# Altium PCB PCB1.PcbDoc (part 3 of 4)
Units mil, origin at the board's own origin, x right, y up, seen from the top; angles counter-clockwise.
Board outline 3904 x 3805 mil, 4 copper layers (Top Layer, Layer 2, Layer 3, Bottom Layer), stack 23.756 mil thick; 231 components, 342 nets, 1187 pads, 543 vias.
Unrouted connection lines stored in the file: 4.
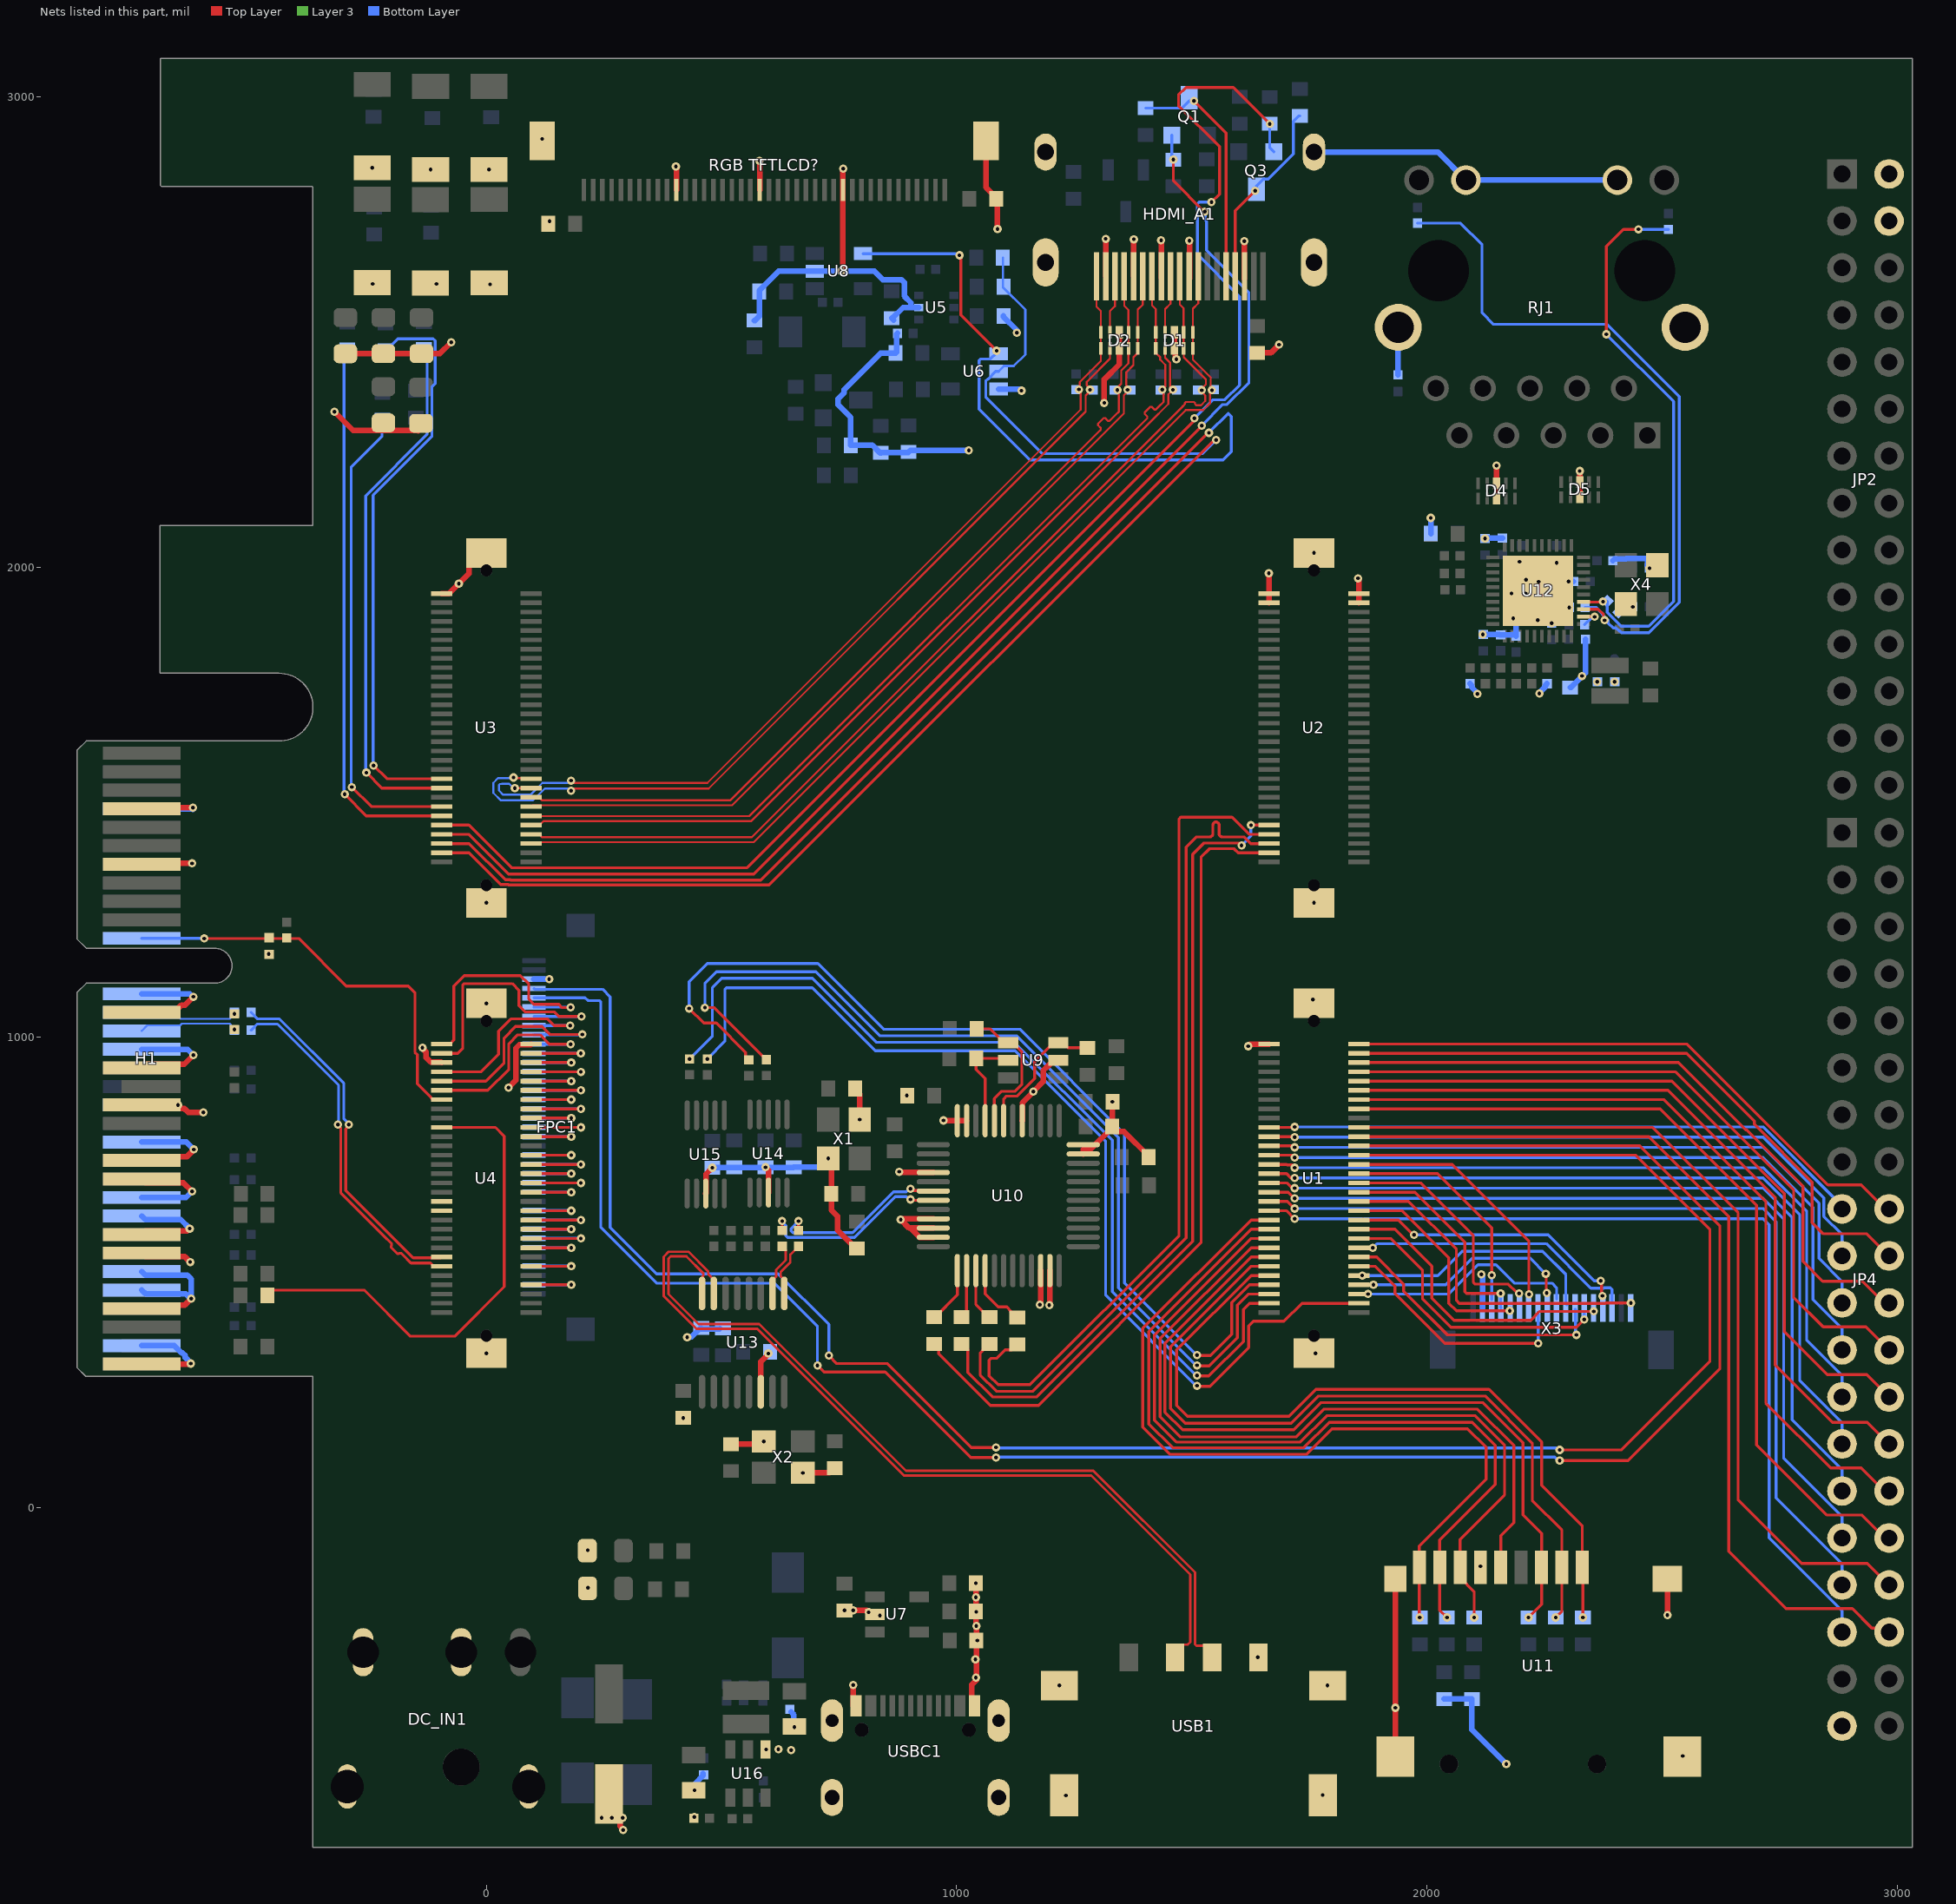
[diagram p5: the nets of this part, all layers, seen from the top]

## Via types
v1: diameter 17.7, hole 7.9, Top Layer to Bottom Layer, tented both sides, 543 vias

## Nets (pads, with @x,y where several pads share a name; then routed paths per layer and width w, separated by ;. In a path a pad name is that pad's centre, name@x,y a point inside that pad or via, vN(x,y) a via of type N, cw(c..) or ccw(c..) an arc to the next point about the centre after c; other vN are vias at no path point) (continued)
B16_N_L5: FPC1.30 U4.20 | length 164.4
  Top Layer w6.16: U4.20@95.47,591.72 v1(180.39,591.72)
  Bottom Layer w6.16: FPC1.30@101,591.95 101.11,591.83 180.28,591.83 v1(180.39,591.72)
B16_N_L6: FPC1.31 U4.18 | length 205.5
  Top Layer w6.16: U4.18@95.47,572.04 v1(200.93,572.04)
  Bottom Layer w6.16: FPC1.31@101,572.26 101.11,572.15 200.82,572.15 v1(200.93,572.04)
B16_N_L7: FPC1.19 U4.42 | length 205.5
  Top Layer w6.16: U4.42@95.47,808.26 v1(200.93,808.26)
  Bottom Layer w6.16: FPC1.19@101,808.48 101.11,808.37 200.82,808.37 v1(200.93,808.26)
B16_N_L8: FPC1.24 U4.32 | length 164.4
  Top Layer w6.16: U4.32@95.47,709.83 v1(180.39,709.83)
  Bottom Layer w6.16: FPC1.24@101,710.05 101.11,709.94 180.28,709.94 v1(180.39,709.83)
B16_N_L9: FPC1.8 U4.53 | length 431.6
  Top Layer w6.16: U4.53@-95.46,926.37 -11.63,926.37 26,964 26,1013 52,1039 130,1039 144,1025 v1(178,1025)
  Bottom Layer w6.16: FPC1.8@101,1025.02 v1(178,1025)
B16_N_L10: FPC1.10 U4.49 | length 441.8
  Top Layer w6.16: U4.49@-95.46,887 3,887 47.61,931.61 47.61,986.14 66.48,1005 114,1005 134,985 v1(179,985)
  Bottom Layer w6.16: FPC1.10@101,985.65 101.32,985.32 178.68,985.32 v1(179,985)
B16_N_L11: FPC1.15 U4.50 | length 205.5
  Top Layer w6.16: U4.50@95.47,887 v1(200.93,887)
  Bottom Layer w6.16: FPC1.15@101,887.22 101.11,887.11 200.82,887.11 v1(200.93,887)
B16_N_L12: FPC1.17 U4.46 | length 205.5
  Top Layer w6.16: U4.46@95.47,847.63 v1(200.93,847.63)
  Bottom Layer w6.16: FPC1.17@101,847.85 101.11,847.74 200.82,847.74 v1(200.93,847.63)
B16_N_L13: FPC1.13 U4.54 | length 205.5
  Top Layer w6.16: U4.54@95.47,926.37 v1(200.93,926.37)
  Bottom Layer w6.16: FPC1.13@101,926.59 101.11,926.48 200.82,926.48 v1(200.93,926.37)
B16_N_L14: FPC1.26 U4.28 | length 164.4
  Top Layer w6.16: U4.28@95.47,670.46 v1(180.39,670.46)
  Bottom Layer w6.16: FPC1.26@101,670.68 101.11,670.57 180.28,670.57 v1(180.39,670.46)
B16_N_L15: FPC1.7 U4.57 | length 587.3
  Top Layer w6.16: U4.57@-95.46,965.74 -60.61,965.74 -50.5,975.85 -50.5,1110.39 -46.89,1114 55,1114 69,1100 69,1067 82,1054 144,1054 154,1044 v1(202,1044)
  Bottom Layer w6.16: FPC1.7@101,1044.7 101.35,1044.35 201.65,1044.35 v1(202,1044)
B16_N_L16: Q1.2 R21.2 U3.7 | length 2780.6
  Top Layer w6.16: U3.7@-95.47,1431.61 -37.61,1431.61 47,1347 568.84,1347 1521.27,2299.43 v1(1521.27,2300.86) ; v1(1461,2866.54) 1461,2821 1526,2756 v1(1527.88,2756)
  Bottom Layer w6.16: Q1.2@1458,2918 1458,2869.54 v1(1461,2866.54) ; v1(1521.27,2300.86) 1565.96,2345.55 1574.97,2345.55 1621.69,2392.27 1621.69,2583.15 1531.63,2673.21 1531.63,2734.83 1528.55,2737.91 1528.55,2755.33 v1(1527.88,2756)
B16_N_L17: U3.5 U6.1 U8.4 | length 3379.6
  Top Layer w6.16: U3.5@-95.47,1411.93 -36.93,1411.93 40.31,1334.69 50.45,1334.69 51.14,1334 583.68,1334 1535.19,2285.51 v1(1536.62,2285.51) ; v1(1006,2663) 1009,2660 1009,2536 v1(1085,2460)
  Bottom Layer w6.16: U8.4@800.77,2666.4 997.6,2666.4 998.79,2665.21 1000.67,2665.21 1002,2663.88 v1@1002,2662 ; v1(1085,2460) 1085,2455.22 1072.26,2442.48 1051.61,2442.48 1048,2438.87 1048,2336 1156,2228 1567,2228 1584,2245 1584,2320 1577.55,2326.45 v1(1536.62,2285.51)
B16_N_L18: D2.4 D2.7 HDMI_A1.3 R7.1 U3.20 | length 2041.4
  Top Layer w4.29: v1(57.7,1552.39) 59.03,1551.06 94.14,1551.06 U3.20@95.47,1549.72 ; v1(180,1524.15) 184.85,1529 472.55,1529 1274.29,2330.74 1274.29,2364.79 1281,2371.5 v1@1281,2379 ; v1@1282,2379 v1@1282.78,2379.78 ; v1(1283.7,2377) 1281.35,2379.35 1281.35,2381.87 1277,2386.22 1277,2394 1326.31,2443.31 1326.31,2464.75 D2.4@1326.31,2499 1326.31,2544.31 1336.83,2554.83 HDMI_A1.3@1336.83,2618
  Bottom Layer w4.29: v1(57.7,1552.39) 56.31,1551 24.65,1551 14.72,1541.06 14.72,1519.7 30.7,1503.72 98.71,1503.72 123.99,1529 171.52,1529 176.37,1524.15 v1(180,1524.15)
B16_N_L19: FPC1.11 U4.58 | length 205.5
  Top Layer w6.16: U4.58@95.47,965.74 v1(200.74,965.74)
  Bottom Layer w6.16: FPC1.11@101,965.96 101.11,965.85 200.63,965.85 v1(200.74,965.74) v1@201,966
B16_N_L20: D1.1 D1.10 HDMI_A1.12 R1.1 U3.6 | length 2124.2
  Top Layer w4.29: U3.6@95.47,1411.93 98.25,1414.7 119.7,1414.7 119.92,1414.92 568.47,1414.92 1487.5,2333.95 1524.2,2333.95 1539.23,2348.98 1539.23,2373.23 1542,2376 v1(1543,2376) ; HDMI_A1.12@1514,2618 1514,2561 1502.37,2549.37 D1.1@1502.37,2499 1502.37,2464.75 1502.37,2441.18 1540.43,2403.12 v1@1540.43,2375.43
B16_N_L21: R54.2 U3.11 | length 1174.2
  Top Layer w6.16: v1(-301.34,1516.66) -255.67,1470.98 U3.11@-95.47,1470.98
  Bottom Layer w6.16: v1(-301.34,1516.66) -302.96,1518.27 -302.96,2437.65 -296,2444.61 R54.2@-296,2462.46
B16_N_L22: D2.1 D2.10 HDMI_A1.6 R5.1 U3.14 | length 1914.8
  Top Layer w4.29: U3.14@95.47,1490.67 98.25,1493.45 522.44,1493.45 1355.65,2326.65 1355.65,2365.42 1363.8,2373.56 v1(1363.8,2377.03) ; v1@1361.23,2378.23 1361.23,2386.01 1361,2386.24 1361,2414.27 1375.97,2429.24 1375.97,2446.29 1383.18,2453.51 1383.58,2453.51 1385.37,2455.3 D2.1@1385.37,2499 1385.37,2547.37 1395.89,2557.89 HDMI_A1.6@1395.89,2618
B16_N_L23: D1.4 D1.7 HDMI_A1.9 R3.1 U3.10 | length 2005.4
  Top Layer w4.29: U3.10@95.47,1451.3 113.19,1451.3 121.81,1459.92 563.47,1459.92 1411.28,2307.72 1450.33,2346.77 1450.33,2367.33 v1(1460,2377) ; v1@1454.31,2382 1454.31,2434.33 1443.31,2445.33 1443.31,2464.75 D1.4@1443.31,2499 1443.31,2548.31 1454.94,2559.94 HDMI_A1.9@1454.94,2618
B16_N_L24: R50.2 U3.19 | length 1231.9
  Top Layer w6.16: v1(-239.97,1578.03) -211.66,1549.72 U3.19@-95.47,1549.72
  Bottom Layer w6.16: v1(-239.97,1578.03) -241,1579.07 -241,2152.58 -116.03,2277.55 -116.03,2383.17 -109,2390.19 -109,2452 ; R50.2@-218,2469 -204.61,2469 -188.19,2485.43 -113.34,2485.43 -109.19,2481.28 -109.19,2452
B16_P_L1: FPC1.36 U4.8 | length 165.3
  Top Layer w6.16: U4.8@95.47,473.61 v1(180.39,473.61)
  Bottom Layer w6.16: FPC1.36@101,473.84 101.11,473.72 180.28,473.72 v1(180.39,473.61) v1@181,473
B16_P_L2: FPC1.28 U4.24 | length 164.4
  Top Layer w6.16: U4.24@95.47,631.09 v1(180.39,631.09)
  Bottom Layer w6.16: FPC1.28@101,631.32 101.11,631.2 180.28,631.2 v1(180.39,631.09)
B16_P_L3: FPC1.22 U4.36 | length 164.4
  Top Layer w6.16: U4.36@95.47,749.2 v1(180.39,749.2)
  Bottom Layer w6.16: FPC1.22@101,749.43 101.22,749.2 v1(180.39,749.2)
B16_P_L4: FPC1.34 U4.12 | length 164.4
  Top Layer w6.16: U4.12@95.47,512.98 v1(180.39,512.98)
  Bottom Layer w6.16: FPC1.34@101,513.2 101.11,513.09 180.28,513.09 v1(180.39,512.98)
B16_P_L5: FPC1.29 U4.22 | length 231.6
  Top Layer w6.16: U4.22@95.47,611.41 v1(200.93,611.41)
  Bottom Layer w6.16: FPC1.29@101,611.63 88.15,611.63 87.92,611.41 v1(200.93,611.41)
B16_P_L6: FPC1.32 U4.16 | length 164.4
  Top Layer w6.16: U4.16@95.47,552.35 v1(180.39,552.35)
  Bottom Layer w6.16: FPC1.32@101,552.57 101.11,552.46 180.28,552.46 v1(180.39,552.35)
B16_P_L7: FPC1.20 U4.40 | length 164.4
  Top Layer w6.16: U4.40@95.47,788.57 v1(180.39,788.57)
  Bottom Layer w6.16: FPC1.20@101,788.8 101.11,788.68 180.28,788.68 v1(180.39,788.57)
B16_P_L8: FPC1.23 U4.34 | length 205.5
  Top Layer w6.16: U4.34@95.47,729.52 v1(200.93,729.52)
  Bottom Layer w6.16: FPC1.23@101,729.74 101.11,729.63 200.82,729.63 v1(200.93,729.52)
B16_P_L9: FPC1.9 U4.51 | length 489
  Top Layer w6.16: U4.51@-95.46,906.68 -1.32,906.68 37.45,945.45 37.45,998.45 62,1023 118,1023 135,1006 v1(204,1006)
  Bottom Layer w6.16: FPC1.9@101,1005.33 101.33,1005.67 203.67,1005.67 v1(204,1006)
B16_P_L10: C49.2 H1.A11 R84.1 U4.47 | length 891
  Top Layer w6.16: v1(-600,1210) -423.73,1210 -423,1210.73 -422.27,1210 -399,1210 -298,1109 -166,1109 -152,1095 -152,968 -147,963 -147,900.96 -120.83,874.79 -120.66,874.79 -113.18,867.31 U4.47@-95.46,867.31
  Bottom Layer w6.16: H1.A11@-733,1210.31 -600.31,1210.31 v1(-600,1210)
B16_P_L11: FPC1.16 U4.48 | length 164.4
  Top Layer w6.16: U4.48@95.47,867.31 v1(180.39,867.31)
  Bottom Layer w6.16: FPC1.16@101,867.53 101.11,867.42 180.28,867.42 v1(180.39,867.31)
B16_P_L12: FPC1.18 U4.44 | length 164.4
  Top Layer w6.16: U4.44@95.47,827.94 v1(180.39,827.94)
  Bottom Layer w6.16: FPC1.18@101,828.16 101.11,828.05 180.28,828.05 v1(180.39,827.94)
B16_P_L13: FPC1.14 U4.52 | length 164.4
  Top Layer w6.16: U4.52@95.47,906.68 v1(180.39,906.68)
  Bottom Layer w6.16: FPC1.14@101,906.91 101.11,906.79 180.28,906.79 v1(180.39,906.68)
B16_P_L14: FPC1.25 U4.30 | length 205.5
  Top Layer w6.16: U4.30@95.47,690.15 v1(200.93,690.15)
  Bottom Layer w6.16: FPC1.25@101,690.37 101.11,690.26 200.82,690.26 v1(200.93,690.15)
B16_P_L15: FPC1.6 U4.59 | length 527.7
  Top Layer w6.16: U4.59@-95.46,985.42 -77.75,985.42 -69.17,994 -69.17,1109.17 -47.34,1131 72,1131 90,1113 90,1081 101,1070 154,1070 161,1063 178.54,1063 v1(179,1063.46)
  Bottom Layer w6.16: FPC1.6@101,1064.39 101.46,1063.92 178.54,1063.92 v1(179,1063.46)
B16_P_L16: Q3.2 R30.2 U3.9 | length 3184.9
  Top Layer w6.16: U3.9@-95.47,1451.3 -37.42,1451.3 53.39,1360.48 554.48,1360.48 1507,2313 1507,2315.13 v1(1505.93,2316.2) ; v1(1542,2776) 1559,2793 1559,2894 1472,2981 1472,3004 1488,3020 1588.46,3020 v1(1666,2942.46)
  Bottom Layer w6.16: v1(1505.93,2316.2) 1545.43,2355.71 1570.76,2355.71 1602,2386.95 1602,2575 1511.94,2665.06 1511.94,2772.39 1515.55,2776 v1(1542,2776) ; v1(1666,2942.46) 1666,2891.81 Q3.2@1674.79,2883.02
B16_P_L17: R10.1 R12.2 U3.3 U6.2 | length 2987.4
  Top Layer w6.16: U3.3@-95.47,1392.24 -37.24,1392.24 30.47,1324.53 46.24,1324.53 46.93,1323.84 601.36,1323.84 1548.76,2271.24 1550.89,2271.24 v1(1551.96,2270.17)
  Bottom Layer w5: U6.2@1089.18,2416 1100.68,2427.5 1121.5,2427.5 1146,2452 1146,2547.57 1098.54,2595.03 R10.1@1098.54,2658
  Bottom Layer w6.16: U6.2@1089.18,2416 1083.18,2416 1067.07,2399.89 1066.46,2399.89 1062.1,2395.53 1062.1,2361.67 1182.77,2241 1522.79,2241 v1(1551.96,2270.17)
B16_P_L18: D2.5 D2.6 HDMI_A1.1 R8.1 U3.18 | length 1975.9
  Top Layer w4.29: v1(60.38,1529.57) 60.62,1529.8 95.23,1529.8 U3.18@95.47,1530.04 ; v1(180,1545.85) 184.85,1541 470,1541 1264,2335 1264,2375 v1@1262,2377 ; v1(1260.29,2377.66) 1262,2379.37 1262,2393.55 1306.63,2438.18 D2.5@1306.63,2499 1306.63,2544.37 1297.46,2553.54 HDMI_A1.1@1297.46,2618
  Bottom Layer w4.29: 33,1538.61 29.23,1538.61 26.72,1536.09 26.72,1524.67 35.67,1515.72 93.74,1515.72 119.02,1541 171.52,1541 176.37,1545.85 v1(180,1545.85) ; 33,1539 48.2,1539 57.64,1529.57 v1(60.38,1529.57)
B16_P_L19: FPC1.12 U4.56 | length 164.4
  Top Layer w6.16: U4.56@95.47,946.05 v1(180.39,946.05)
  Bottom Layer w6.16: FPC1.12@101,946.28 101.11,946.16 180.28,946.16 v1(180.39,946.05)
B16_P_L20: D1.2 D1.9 HDMI_A1.10 R2.1 U3.8 | length 2120
  Top Layer w4.29: U3.8@95.47,1431.61 113.19,1431.61 115.96,1428.84 115.96,1427.72 118.48,1425.21 564.21,1425.21 1481,2342 1485.66,2346.66 1485.66,2348.95 1487.79,2351.08 1504.82,2351.08 1506.95,2348.95 1506.95,2346.75 1509.46,2344.24 1512,2344.24 1519.94,2344.24 1528.94,2353.24 1528.94,2364.73 1521.3,2372.37 v1(1521.3,2376) ; HDMI_A1.10@1474.63,2618 1474.63,2558.37 1482.68,2550.32 D1.2@1482.68,2499 D1.9@1482.68,2464.75 1483.07,2464.36 1483.07,2445.93 1530.14,2398.86 1530.14,2388.36 1523.92,2382.14 1523.92,2379.08 v1@1524,2379
B16_P_L21: R53.2 U3.13 | length 1017.4
  Top Layer w6.16: v1(-286,1532) -244.67,1490.67 U3.13@-95.47,1490.67
  Bottom Layer w6.16: v1(-286,1532) -287.62,1533.62 -287.62,2212.99 -222,2278.61 -222,2312.46 R53.2@-221,2313.46
B16_P_L22: D2.2 D2.9 HDMI_A1.4 R6.1 U3.16 | length 1909.7
  Top Layer w4.29: U3.16@95.47,1510.35 113.19,1510.35 115.96,1507.58 115.96,1506.25 118.48,1503.74 518.18,1503.74 1305.22,2290.78 1306.74,2292.29 1306.74,2295.85 1300.85,2301.74 1300.85,2304.75 1312.89,2316.79 1315.9,2316.79 1321.8,2310.9 1325.35,2310.9 1338.72,2324.28 1345.36,2330.92 1345.36,2367.22 1344.56,2368.01 1344.56,2373.87 v1(1342,2376.43) ; v1@1344.67,2384.3 1350,2389.63 1350,2417.82 1365.68,2433.5 D2.2@1365.68,2499 1365.68,2546.32 1356.52,2555.48 HDMI_A1.4@1356.52,2618
B16_P_L23: D1.5 D1.6 HDMI_A1.7 R4.1 U3.12 | length 2016.9
  Top Layer w4.29: U3.12@95.47,1470.98 96.25,1470.21 559.21,1470.21 1404,2315 1405.52,2316.52 1405.52,2320.07 1399.89,2325.7 1399.89,2328.71 1411.93,2340.76 1414.94,2340.76 1420.57,2335.13 1424.13,2335.13 1430.5,2341.5 1440.04,2351.04 1440.04,2374.82 v1(1437.47,2377.38) 1444.02,2383.93 1444.02,2430.07 1433.02,2441.07 1433.02,2445.91 1423.63,2455.3 D1.5@1423.63,2499 1423.63,2548.37 1415.57,2556.43 HDMI_A1.7@1415.57,2618
  Bottom Layer w4.29: R4.1@1433,2376.54 1433.85,2377.38 v1(1437.47,2377.38)
B16_P_L24: R51.2 U3.17 | length 1126.3
  Top Layer w6.16: v1(-255.31,1562.69) -222.66,1530.04 U3.17@-95.47,1530.04
  Bottom Layer w6.16: v1(-255.31,1562.69) -256.93,1564.31 -256.93,2151.02 -126.19,2281.76 -126.19,2451.9 -131.29,2457 R51.2@-133,2457
B34_IO0: JP4.17 U1.41 | length 1294.8
  Top Layer w6.16: U1.41@1664.54,808.26 1717.99,808.26 v1(1719,809.26)
  Bottom Layer w6.16: v1(1719,809.26) 2715,809.26 2883.07,641.19 JP4.17@2883.07,635
B34_IO25: JP4.20 U1.58 | length 1360.6
  Top Layer w6.16: U1.58@1855.47,965.74 2552.39,965.74 2696.41,821.72 2696.41,814.82 2819.54,691.69 2819.54,605.46 2843,582 2936.07,582 JP4.20@2983.07,535
B34_N_L1: U1.6 X3.9 | length 470.9
  Bottom Layer w6.16: v1(1875.07,453.93) 2046.93,453.93 2109,516 2147,516 2186,477 2266,477 2276,467 X3.9@2276,443
B34_N_L2: R76.2 U1.3 | length 2007.4
  Top Layer w6.16: v1(1511,280.55) 1511.95,279.6 1536.6,279.6 1610,353 1610,421 1623.24,434.24 U1.3@1664.53,434.24
  Bottom Layer w6.16: v1(432,953.73) 480.61,1002.34 480.61,1105.68 500.61,1125.68 693.32,1125.68 829.89,989.11 1122.89,989.11 1331.14,780.86 1331.14,458.63 1509.22,280.55 v1(1511,280.55)
B34_N_L3: JP4.21 U1.37 | length 1452.2
  Top Layer w6.16: U1.37@1664.54,768.89 1715.98,768.89 v1(1719,765.86)
  Bottom Layer w6.16: v1(1719,765.86) 2715,765.86 2834,646.86 2834,529.52 2883.07,480.45 JP4.21@2883.07,435
B34_N_L4: R55.1 U1.11 U11.2 | length 1661.8
  Top Layer w6.16: U1.11@1664.53,512.98 1626.41,512.98 1455,341.57 1455,210.32 1486.31,179 1711.69,179 1769.61,236.92 2124.08,236.92 2224.31,136.68 2224.31,14.68 2287.33,-48.33 U11.2@2287.33,-127.32 2287.33,-220.84 v1(2274.17,-234)
B34_N_L5: U1.10 X3.8 | length 540.3
  Bottom Layer w6.16: v1(1862.7,493.3) 2023.3,493.3 2075,545 2246,545 2295.52,495.47 2295.52,433.47 X3.8@2298,431
B34_N_L6: R72.2 U1.7 | length 2119.5
  Top Layer w6.16: v1(431.12,1061.12) 462.12,1030.12 488.88,1030.12 551.24,967.76 551.24,958.49 554.87,954.87 R72.2@561.13,954.87 ; v1(1511,323.95) 1511.95,323 1540,323 1585,368 1585,436 1622.61,473.61 U1.7@1664.53,473.61
  Bottom Layer w6.16: v1(431.12,1061.12) 431.12,1118.03 470.09,1157 704.91,1157 844.91,1017 1134.35,1017 1357,794.35 1357,477 1510.05,323.95 v1(1511,323.95)
B34_N_L7: U1.14 X3.7 | length 595.5
  Top Layer w6.16: U1.14@1855.47,532.67 1893.33,532.67 1951,475 1951,460 2044,367 v1(2318,367)
  Bottom Layer w6.16: X3.7@2315.61,421.61 2316.61,420.61 2316.61,368.39 v1(2318,367)
B34_N_L8: U1.16 X3.3 | length 607.7
  Top Layer w6.16: U1.16@1855.47,552.35 v1(1885.35,552.35)
  Bottom Layer w6.16: v1(1885.35,552.35) 1886.09,552.35 1894.73,561 2254,561 2348.93,466.07 2376.6,466.07 2377.51,466.98 2390.39,466.98 2394,463.37 X3.3@2394,439
B34_N_L9: U1.18 X3.6 | length 612.6
  Top Layer w6.16: U1.18@1855.47,572.04 1922.96,572.04 1991,504 1991,443 2051.07,382.93 2317.93,382.93 v1(2335,400)
  Bottom Layer w6.16: X3.6@2334.95,411.95 2334.95,400.05 v1(2335,400)
B34_N_L10: U1.26 X3.1 | length 732.5
  Top Layer w6.16: U1.26@1855.47,650.78 1961.22,650.78 2063,549 2063,440 2068.93,434.07 2379.94,434.07 2380.87,435 v1(2434,435)
B34_N_L11: U1.22 X3.4 | length 592.6
  Top Layer w6.16: U1.22@1865,613 1866.59,611.41 1939.59,611.41 1971,580 v1(1973,580) ; v1(2370,482) 2371.67,480.33 2371.67,451.67 v1(2373.34,450)
  Bottom Layer w6.16: v1(1973,580) 2258,580 2356,482 v1(2370,482)
B34_N_L12: R36.1 U1.17 U11.7 | length 1740.8
  Top Layer w6.16: U1.17@1664.53,572.04 1626.41,572.04 1421,366.63 1421,185.26 1467.26,139 1730.74,139 1786.9,195.16 2102.84,195.16 2165.26,132.74 2165.26,26.26 2070.8,-68.2 U11.7@2070.8,-127.32 2070.8,-148.97 2100.67,-178.84 v1(2100.67,-234)
B34_N_L13: JP4.32 U1.46 | length 1804.3
  Top Layer w6.16: U1.46@1855.47,847.63 2496.57,847.63 2701.43,642.77 2701.43,132.88 2850.31,-16 2925,-16 2974,-65 JP4.32@2983.07,-65
B34_N_L14: JP4.28 U1.50 | length 1647.7
  Top Layer w6.16: U1.50@1855.47,887 2512.88,887 2740.8,659.08 2740.8,303 2862.8,181 2937.07,181 JP4.28@2983.07,135
B34_N_L15: R38.1 U1.19 U11.8 | length 1764.2
  Top Layer w6.16: U1.19@1664.53,591.72 1626.41,591.72 1409,374.32 1409,177.57 1459.57,127 1738.43,127 1792.67,181.24 2096.76,181.24 2145.57,132.43 2145.57,49 2027.49,-69.09 U11.8@2027.49,-127.32 2027.49,-218.66 v1(2042.83,-234)
B34_N_L16: JP4.24 U1.54 | length 1506.4
  Top Layer w6.16: U1.54@1855.47,926.37 2529.18,926.37 2780.17,675.38 2780.17,446.83 2843,384 2934.07,384 JP4.24@2983.07,335
B34_N_L17: FPC1.5 U1.38 | length 4482.8
  Top Layer w6.16: v1(704,301.99) 717.99,288 848,288 1030.01,105.99 v1(1084,105.99) ; U1.38@1855.47,768.89 2453.11,768.89 2623.3,598.7 2623.3,295.3 2427.89,99.89 v1(2282.59,99.89)
  Bottom Layer w6.16: FPC1.5@101,1084.07 209.7,1084.07 215.77,1078 239.71,1078 243.32,1074.39 243.32,595.68 362,477 612.46,477 704,385.46 v1(704,301.99) ; v1(1084,105.99) 1085.09,107.08 2272.27,107.08 2279.46,99.89 v1(2282.59,99.89)
B34_N_L18: U1.28 X3.15 | length 483.2
  Top Layer w6.16: U1.28@1855.47,670.46 1974.54,670.46 2081,564 2081,458.61 2084.61,455 v1(2157,455)
  Bottom Layer w6.16: v1(2157,455) 2157,425.34 X3.15@2157.73,424.61
B34_N_L19: JP4.33 U1.25 | length 1927
  Top Layer w6.16: U1.25@1664.54,650.78 1703.06,650.78 1718.17,635.66 v1(1719,635.66)
  Bottom Layer w6.16: v1(1719,635.66) 2715,635.66 2743,607.66 2743,20.52 2883.07,-119.55 JP4.33@2883.07,-165
B34_N_L20: U1.30 X3.13 | length 496.2
  Top Layer w6.16: U1.30@1855.47,690.15 1986.85,690.15 2099,578 2099,478.61 2102.61,475 2173,475 2190.51,457.49 2193.91,457.49 v1(2196.12,455.28)
B34_N_L21: JP4.36 U1.40 | length 1980.7
  Top Layer w6.16: U1.40@1855.47,788.57 2472.11,788.57 2642.37,618.31 2642.37,-93 2764.37,-215 2905,-215 2946.39,-256.39 2974.46,-256.39 JP4.36@2983.07,-265
B34_N_L22: JP4.23 U1.35 | length 1531.3
  Top Layer w6.16: U1.35@1664.54,749.2 1713.96,749.2 v1(1719,744.16)
  Bottom Layer w6.16: v1(1719,744.16) 2715,744.16 2821,638.16 2821,442.52 2883.07,380.45 JP4.23@2883.07,335
B34_N_L23: JP4.31 U1.27 | length 1847.9
  Top Layer w6.16: U1.27@1664.54,670.46 1705.08,670.46 1718.17,657.36 v1(1719,657.36)
  Bottom Layer w6.16: v1(1719,657.36) 2715,657.36 2759,613.36 2759,104.52 2883.07,-19.55 JP4.31@2883.07,-65
B34_N_L24: JP4.25 U1.33 | length 1610.5
  Top Layer w6.16: U1.33@1664.54,729.52 1701.91,729.52 1703.19,728.23 1713.23,728.23 v1(1719,722.46)
  Bottom Layer w6.16: v1(1719,722.46) 2715,722.46 2808,629.46 2808,355.52 2883.07,280.45 JP4.25@2883.07,235
B34_P_L1: R78.2 U1.4 | length 2155.9
  Top Layer w6.16: v1(1511,258.85) 1511.95,257.9 1538.81,257.9 1621,340.09 1621,386 1631,396 1696,396 1734.24,434.24 U1.4@1855.47,434.24
  Bottom Layer w6.16: v1(469.65,953.61) 507.16,991.12 507.16,1101.46 510.77,1105.07 692.93,1105.07 827,971 1124.5,971 1317,778.5 1317,451.07 1509.22,258.85 v1(1511,258.85)
B34_P_L3: JP4.19 U1.39 | length 1373.1
  Top Layer w6.16: U1.39@1664.54,788.57 1717.99,788.57 v1(1719,787.56)
  Bottom Layer w6.16: v1(1719,787.56) 2715,787.56 2844.49,658.07 2844.49,619.02 2883.07,580.45 JP4.19@2883.07,535
B34_P_L4: R46.1 U1.9 U11.1 | length 1644.8
  Top Layer w6.16: U1.9@1664.53,493.3 1626.41,493.3 1468.06,334.94 1468.06,216.94 1491,194 1707,194 1763.84,250.84 2132.16,250.84 2244,139 2244,47 2330.64,-39.64 U11.1@2330.64,-127.32 2332,-128.68 v1(2332,-234)
B34_P_L5: U1.8 X3.10 | length 477.2
  Top Layer w6.16: U1.8@1855.47,473.61 v1(1886.61,473.61) ; v1(2253,497) 2255,495 2254.05,494.05 2254.05,457.06 v1(2255.09,456.01)
  Bottom Layer w6.16: v1(1886.61,473.61) 2040.61,473.61 2097,530 2220,530 v1(2253,497)
B34_P_L6: R73.2 U1.5 | length 2076
  Top Layer w6.16: v1(464.68,1062.97) 484.71,1062.97 566.1,981.59 R73.2@595.4,952.28 ; v1(1511,302.25) 1511.95,301.3 1537.3,301.3 1597,361 1597,430 1620.93,453.93 U1.5@1664.53,453.93
  Bottom Layer w6.16: v1(464.68,1062.97) 464.68,1114.68 489,1139 701,1139 837,1003 1128,1003 1344,787 1344,467.47 1509.22,302.25 v1(1511,302.25)
B34_P_L7: U1.12 X3.11 | length 525.5
  Top Layer w6.16: U1.12@1855.47,512.98 1890.02,512.98 1932,471 1932,455 2038,349 v1(2237,349)
  Bottom Layer w6.16: X3.11@2236.48,415.47 2236.74,415.21 2236.74,349.26 v1(2237,349)
B34_P_L8: U1.20 X3.5 | length 629.2
  Top Layer w6.16: U1.20@1855.47,591.72 1932.28,591.72 2011,513 2011,445 2058,398 2221,398 2240,417 v1(2355,417)
  Bottom Layer w6.16: X3.5@2354.59,418.59 2355,418.17 v1(2355,417)
B34_P_L9: R56.1 U1.13 U11.3 | length 1680
  Top Layer w6.16: U1.13@1664.53,532.67 1626.41,532.67 1443,349.26 1443,202.63 1480.63,165 1717.37,165 1775.37,223 2119,223 2204.63,137.37 2204.63,-15.63 2244.02,-55.02 U11.3@2244.02,-127.32 2244.02,-206.31 v1(2216.33,-234)
B34_P_L10: U1.24 X3.14 | length 473.1
  Top Layer w6.16: U1.24@1855.47,631.09 1946.91,631.09 2047,531 2047,434 2063,418 v1(2176.49,418)
  Bottom Layer w6.16: v1(2176.49,418) 2176.49,419.49 2177.41,420.41 X3.14@2177.41,424.61
B34_P_L11: U1.15 U11.5 | length 1574.7
  Top Layer w6.16: U1.15@1664.53,552.35 1626.41,552.35 1432.84,358.78 1432.84,193.1 1475.94,150 1722.06,150 1781.14,209.08 2107.92,209.08 2184.94,132.06 2184.94,-32.06 2157.41,-59.59 U11.5@2157.41,-127.32
B34_P_L12: JP4.26 U1.52 | length 1577.9
  Top Layer w6.16: U1.52@1855.47,906.68 2521.03,906.68 2760.48,667.23 2760.48,373.52 2851.55,282.45 2935.62,282.45 JP4.26@2983.07,235
B34_P_L14: JP4.30 U1.48 | length 1723.6
  Top Layer w6.16: U1.48@1855.47,867.31 2504.72,867.31 2721.11,650.92 2721.11,222 2859.11,84 2924,84 2973,35 JP4.30@2983.07,35
B34_P_L15: R57.1 U1.21 U11.9 | length 1788.8
  Top Layer w6.16: U1.21@1664.53,611.4 1626.4,611.4 1396,381 1396,170.89 1453.85,113.04 1744.15,113.04 1798.43,167.32 2086.68,167.32 2125.89,128.11 2125.89,59.89 1984.18,-81.82 U11.9@1984.18,-127.32 1984.18,-233.18 v1(1985,-234)
  Bottom Layer w6.16: v1(1985,-234) R57.1@1986,-234
B34_P_L16: JP4.22 U1.56 | length 1433.2
  Top Layer w6.16: U1.56@1855.47,946.05 2535.08,946.05 2677.91,803.22 2680.17,803.22 2799.85,683.54 2799.85,523.15 2842,481 2927,481 2973,435 JP4.22@2983.07,435
B34_P_L17: FPC1.4 U1.36 | length 4404.9
  Top Layer w6.16: v1(728.12,323) 745.12,306 853,306 1031.31,127.69 1083.91,127.69 v1(1083.97,127.75) ; U1.36@1855.47,749.2 2444.8,749.2 2602,592 2602,310 2414.41,122.41 v1(2282.59,122.41)
  Bottom Layer w6.16: FPC1.4@101,1103.76 102.76,1102 247,1102 263,1086 263,595.68 362,496.68 620.61,496.68 728.12,389.18 v1(728.12,323) ; v1(1083.97,127.75) 1085.03,126.68 2275.19,126.68 2279.46,122.41 v1(2282.59,122.41)
B34_P_L18: JP4.35 U1.23 | length 2006.6
  Top Layer w6.16: U1.23@1664.54,631.09 1701.91,631.09 1701.91,630.23 1718.17,613.96 v1(1719,613.96)
  Bottom Layer w6.16: v1(1719,613.96) 2715,613.96 2728,600.96 2728,-64.48 2883.07,-219.55 JP4.35@2883.07,-265
B34_P_L19: JP4.18 U1.60 | length 1272.8
  Top Layer w6.16: U1.60@1855.47,985.42 2553.64,985.42 2853.07,686 2924,686 2975,635 JP4.18@2983.07,635
B34_P_L20: U1.32 X3.16 | length 483.1
  Top Layer w6.16: U1.32@1855.47,709.83 2023.17,709.83 2138,595 v1(2138,494)
  Bottom Layer w6.16: X3.16@2138.02,441.98 v1(2138,494)
B34_P_L21: JP4.34 U1.42 | length 1888.3
  Top Layer w6.16: U1.42@1855.47,808.26 2480.26,808.26 2662.06,626.46 2662.06,16 2797.06,-119 2937.07,-119 JP4.34@2983.07,-165
B34_P_L22: U1.34 X3.12 | length 542.9
  Top Layer w6.16: U1.34@1855.47,729.52 2054.48,729.52 2217,567 2217,453.93 v1(2217.72,453.21)
B34_P_L23: JP4.29 U1.29 | length 1768.7
  Top Layer w6.16: U1.29@1664.54,690.15 1701.91,690.15 1712.99,679.06 v1(1719,679.06)
  Bottom Layer w6.16: v1(1719,679.06) 2715,679.06 2777,617.06 2777,186.52 2883.07,80.45 JP4.29@2883.07,35
B34_P_L24: JP4.27 U1.31 | length 1689.6
  Top Layer w6.16: U1.31@1664.53,709.83 1701.9,709.83 1710.97,700.76 v1(1719,700.76)
  Bottom Layer w6.16: v1(1719,700.76) 2715,700.76 2793,622.76 2793,270.52 2883.07,180.45 JP4.27@2883.07,135
EXTUSB_D+: U13.8 USB1.3 | length 1780.5
  Top Layer w5.1: U13.8@458.53,455.05 460.23,456.75 460.23,492.08 461.62,493.47 461.62,497.69 425.41,533.9 391.9,533.9 387.1,529.1 387.1,453.9 451,390 580.28,390 892.28,78 1290.64,78 1507,-138.36 1507,-291 1510.23,-294.23 1526.24,-294.23 1543.38,-311.36 USB1.3@1543.38,-318.58
EXTUSB_D-: U13.7 USB1.2 | length 1812.3
  Top Layer w5.1: U13.7@483.53,455.05 483.53,484.47 471.72,496.28 471.72,501.87 429.59,544 387.72,544 377,533.28 377,449.72 446.82,379.9 576.1,379.9 888.1,67.9 1286.46,67.9 1496.9,-142.54 1496.9,-286.3 1491.6,-291.6 1481.76,-291.6 1464.62,-308.73 USB1.2@1464.62,-318.58
FPGA_TCK: R31.1 U2.3 | length 1747.2
  Top Layer w6.16: R31.1@952.13,347.46 961.94,337.64 961.94,327.06 1022,267 1072,217 1174.11,217 1520,562.89 1520,1383 1538,1401 1590,1401 1598.76,1392.24 1599.23,1392.24 1599.4,1392.07 1612.6,1392.07 1612.77,1392.24 U2.3@1664.53,1392.24
FPGA_TCK_R: R31.2 U10.13 | length 120.8
  Top Layer w6.16: R31.2@952.13,404.54 954.09,404.54 1001.61,452.06 U10.13@1001.61,503.67
FPGA_TDI: R33.1 U2.9 | length 1733
  Top Layer w6.16: R33.1@1010.13,347.46 1012.09,347.46 1023.78,335.77 1023.78,287.22 1076,235 1171,235 1502,566 1502,1389 1526,1413 1601,1413 v1(1606,1408) ; v1(1626,1451) 1626.15,1451.15 1664.38,1451.15 U2.9@1664.53,1451.3
  Bottom Layer w6.16: v1(1606,1408) 1626,1428 v1(1626,1451)
FPGA_TDI_R: R33.2 U10.14 | length 103.8
  Top Layer w6.16: R33.2@1010.13,404.54 1021.3,415.72 U10.14@1021.3,503.67
FPGA_TDO: R34.1 U2.5 | length 1737.3
  Top Layer w6.16: R34.1@1070,347.46 1068.03,347.46 1056.35,335.77 1056.35,333.8 1050,327.46 1050,282 1085,247 1162,247 1488,573 1488,1404 1510,1426 1538.44,1426 ccw(c1538.44,1432.58) 1545.02,1432.58 1545.02,1451.26 cw(c1551.6,1451.26) 1558.18,1451.26 1558.18,1432.58 ccw(c1564.76,1432.58) 1564.76,1426 1581,1426 1611.37,1426 1625.44,1411.93 U2.5@1664.53,1411.93
FPGA_TDO_R: R34.2 U10.15 | length 112.3
  Top Layer w6.16: U10.15@1040.98,503.67 1040.98,431.59 1068.03,404.54 R34.2@1070,404.54
FPGA_TMS: R35.1 U2.7 | length 1744.9
  Top Layer w6.16: R35.1@1129,346.91 1117.32,335.23 1103.03,335.23 1084.8,317 1072.61,317 1069,313.39 1069,280 1088,261 1156,261 1473,578 1473,1464.39 1476.61,1468 1585.71,1468 1600,1453.71 1622.1,1431.61 U2.7@1664.53,1431.61
FPGA_TMS_R: R35.2 U10.16 | length 139.7
  Top Layer w6.16: U10.16@1060.67,503.67 1060.67,454.33 1088.61,426.39 1106.61,426.39 1115.35,417.65 1115.35,415.68 1127.03,404 R35.2@1129,404
GND: "RGB TFTLCD?.11" "RGB TFTLCD?.20" "RGB TFTLCD?.29" "RGB TFTLCD?.A" "RGB TFTLCD?.B" C1.2 C2.1 C3.1 C4.1 C5.1 C6.2 C7.2 C8.1 C9.1 C10.1 C12.1 C13.1 C14.2 C15.1 C16.1 C17.2 C18.2 C19.1 C21.1 C22.1 C23.1 C24.1 C25.2 C26.1 C27.1 C28.1 C29.1 C30.1 C31.2 C32.2 C33.1 C34.1 C35.1 C36.1 C37.1 C38.1 C39.1 C40.1 C41.1 C42.2 C43.2 C44.2 C45.2 C46.1 C47.1 C48.1 C49.1 C61.1 C62.1 C63.2 C65.1 C66.2 D1.3 D1.8 D2.3 D2.8 D4.3 D4.8 D5.3 D5.8 DC_IN1.1 DC_IN1.2 DC_IN1.3 DC_IN1.5 FPC1.3 H1.A4 H1.A12 H1.A15 H1.A18 H1.A20 H1.A23 H1.A24 H1.A27 H1.A28 H1.A31 H1.B4 H1.B7 H1.B13 H1.B16 H1.B18 H1.B21 H1.B22 H1.B25 H1.B26 H1.B29 H1.B32 HDMI_A1.2 HDMI_A1.5 HDMI_A1.8 HDMI_A1.11 HDMI_A1.17 HDMI_A1.20 HDMI_A1.21 HDMI_A1.22 HDMI_A1.23 JP2.2 JP2.4 JP4.39 LED1.2 LED2.2 LED3.2 LED4.2 LED5.2 LED6.2 LED7.2 R11.1 R15.1 R28.1 R58.1 R60.2 R74.1 R97.2 R99.2 R102.1 R104.1 R107.2 R108.2 R116.2 RJ1.12 RJ1.13 RJ1.B01 RJ1.B02 SW1.1 SW2.1 SW3.1 SW4.1 SW5.1 SW6.1 U1.59 U1.61 U1.62 U2.57 U2.58 U2.59 U2.60 U2.61 U2.62 U3.59 U3.61 U3.62 U4.55 U4.60 U4.61 U4.62 U5.2 U6.3 U7.2 U8.2 U9.2 U10.4 U10.9 U10.10 U10.11 U10.22 U10.23 U10.35 U10.36 U10.41 U10.47 U10.48 U11.0@1933,-152 U11.0@1933,-529.95 U11.0@2511.74,-152 U11.0@2543.24,-529.95 U11.6 U12.41 U13.14 U14.3 U15.3 U16.1 USB1.4 USB1.5 USB1.6 USB1.7 USB1.8 USBC1.0 USBC1.A1 USBC1.A12 USBC1.B1 USBC1.B12 X1.2 X1.4 X2.2 X2.4 X3.17 X4.2 X4.4 | length 10324.9
  Top Layer w12: H1.B32@-733,304.8 -630.2,304.8 v1(-629,306) ; H1.B29@-733,422.91 -725.22,430.69 -641.31,430.69 v1(-628,444) ; H1.B26@-733,541.02 -725.22,533.24 -641.24,533.24 v1(-630,522) ; H1.B25@-733,580.39 -725.22,588.17 -635.83,588.17 v1(-631,593) ; H1.B22@-733,698.5 -725.22,690.72 -644.72,690.72 v1(-626,672) ; H1.B21@-733,737.87 -725.22,745.65 -637.35,745.65 v1@-622,761 ; H1.B16@-733,934.72 -725.22,942.5 -642.5,942.5 v1(-623,962) ; H1.B13@-733,1052.83 -664.1,1052.83 -648.51,1068.43 -640.57,1068.43 v1(-623,1086) ; H1.B7@-732.91,1369.8 v1(-626,1369.8) ; H1.B4@-730.91,1488 v1(-624,1488) ; v1(-655.98,855.98) v1@-650,850 ; -650,848.2 -642.2,848.2 -634,840 v1(-602,840) ; v1(-622.44,761.39) v1@-622.05,761 ; v1(-463,1177) -462.41,1176.41 C49.1@-462,1176.41 ; v1(-323,2330) -283.6,2290.6 -225,2290.6 -224.5,2290.1 -145.5,2290.1 LED5.2@-145,2289.6 ; LED7.2@-300,2453.6 -299.94,2453.66 -138.07,2453.66 LED4.2@-138,2453.73 -99.27,2453.73 v1(-75,2478) ; v1(-136.07,977.53) -136.07,975.99 -128.1,968.02 -128.1,956.67 -118.56,947.13 -96.54,947.13 U4.55@-95.46,946.05 ; U3.59@-95.46,1943.42 -79.9,1943.42 v1(-58.6,1964.72) -37.31,1986.02 -37.31,2004.55 -11.81,2030.05 U3.62@0,2030.05 ; v1(47,893) 62.83,908.83 62.83,976.83 70.34,984.34 94.39,984.34 U4.60@95.47,985.42 ; v1@118.55,2906.43 v1(118.55,2910.45) ; C40.1@131.46,2730 131.46,2732.54 v1(134.22,2735.31) ; LED2.2@214.6,-92 v1(215.6,-91) ; v1(245,-660) 261,-644 C61.1@261,-609.3 ; C61.1@261,-642.76 284.53,-666.29 284.53,-677.99 291,-684.46 v1(291,-686) ; v1(403,2852) 403.98,2851.02 403.98,2802 ; v1(418.53,190) R58.1@418.53,190.46 ; C65.1@441,-601.4 442.49,-601.4 v1(442.69,-601.61) ; R116.2@441.27,-661 441.27,-658.73 v1(442,-658) ; U15.3@466.53,667.75 467.01,668.24 467.01,708.94 v1(480.53,722.46) ; C31.2@520.07,134.66 584.31,134.66 v1(590.12,140.46) ; v1(581,2864) 581.15,2863.85 581.15,2802 ; U13.14@583.53,246 583.53,309.91 599.5,325.89 v1(599.5,327.43) ; U16.1@593.4,-514.82 v1(594.82,-514.82) ; v1(593.53,723.46) 599.84,717.14 U14.3@599.84,669.75 ; v1(655,-467) C62.1@655,-465.4 ; v1(672.79,73.54) 729.07,73.54 739.1,83.57 C32.2@741.07,83.57 ; X1.4@733.46,735.87 C6.2@733.46,667 733.46,632.45 746.46,619.45 746.46,590.16 786.03,550.58 R28.1@788,550.58 ; v1(754.7,2629) 754.7,2630.54 758.31,2634.16 758.31,2802 758.31,2846.31 v1(759,2847) ; v1(761.69,-218.87) 808.75,-218.87 817.35,-227.46 U7.2@826.2,-227.46 ; USBC1.A1@780.32,-421.82 v1(780.32,-377.68) ; C7.2@784.09,891 784.09,889.03 793.93,879.19 v1(793.93,825) ; v1(878,714) 879.67,712.33 U10.4@950.43,712.33 ; v1(894,876) C4.1@895.46,876 ; U10.11@950.43,574.54 921.49,574.54 901.81,594.22 ; U10.10@950.43,594.22 901.81,594.22 ; U10.9@950.43,613.91 882.91,613.91 v1(881,612) 898.78,594.22 901.81,594.22 ; v1(972,823) 972.43,822.57 U10.48@1001.61,822.57 U10.47@1021.3,822.57 ; USBC1.B1@1032.29,-421.76 1032.29,-377 1042.24,-367.05 C16.1@1042.24,-282.87 v1(1043.9,-282.87) ; C5.1@1041.24,-160.87 1041.74,-161.37 1041.74,-222 1041.62,-222.12 1041.62,-251.62 1042.12,-252.12 1042.12,-281.98 C16.1@1041.74,-282.37 ; 1062.43,2906.43 1062.43,2807.08 1084.54,2784.97 C42.2@1084.54,2783 1087,2780.54 v1(1087,2719) ; U10.41@1139.41,822.57 1139.9,823.05 1139.9,860.9 1163.03,884.03 v1(1163.03,884.38) 1184.65,906.01 1184.65,929.56 1191.8,936.7 1192.17,936.7 1206.47,951 U9.2@1216.31,951 ; v1(1177,431) 1178.78,432.78 U10.22@1178.78,503.67 ; v1(1197,430) 1198.46,431.46 U10.23@1198.46,503.67 ; USB1.7@1218.56,-379.2 v1(1218.56,-378.57) ; U10.35@1269.33,751.7 1269.33,761.54 1284.6,761.54 C18.2@1331.09,808.03 ; v1(1314,2349) 1314,2399 1346,2431 D2.8@1346,2464.75 D2.3@1346,2499 ; v1(1317,2698) 1317.15,2697.85 HDMI_A1.2@1317.15,2618 ; C17.2@1331.54,863 v1(1331.31,862.77) 1331.31,810.23 C18.2@1331.09,810 C18.2@1331.09,808.03 ; HDMI_A1.5@1376.2,2618 v1@1376.2,2696.2 ; C19.1@1408.54,745 1408.54,746.97 1356.24,799.27 1339.85,799.27 C18.2@1331.09,808.03 ; HDMI_A1.8@1435.15,2615 v1@1435.15,2694.85 ; D1.3@1463,2499 D1.8@1463,2464.75 1464.87,2462.88 1464.87,2445.75 1467.35,2443.28 v1(1467.35,2441.74) ; HDMI_A1.11@1495.15,2614 v1@1495.15,2693.85 ; HDMI_A1.17@1612.15,2613 v1@1612.15,2692.85 ; v1(1620,981) 1623.9,984.9 1664.01,984.9 U1.59@1664.54,985.42 ; R11.1@1639,2455.46 1668.46,2455.46 v1(1686,2473) ; v1(1664,1987) 1664.54,1986.46 U2.59@1664.54,1943.42 U2.57@1664.54,1923.74 ; U1.61@1760,327.95 v1(1763.05,327.95) ; v1(1854,1976) 1855.47,1974.53 U2.60@1855.47,1943.42 U2.58@1855.47,1923.74 ; U11.0@1933,-529.95 v1(1933,-426) U11.0@1933,-152 ; U11.6@2114.1,-127.32 v1(2114.1,-124.9) ; D4.3@2148.24,2145.59 D4.8@2148.24,2177.99 v1(2148.24,2215.76) ; v1(2197.43,2011.43) U12.41@2199,2013 ; U12.41@2209,1975 v1(2211,1973) ; U12.41@2276,2009 v1(2276.17,2009.17) ; U12.41@2291.48,1979.32 v1(2301.36,1969.43) ; U12.41@2302,1913 v1(2303.07,1914.07) ; D5.3@2325.24,2148.59 D5.8@2325.24,2180.99 v1(2325.24,2204.24) ; X4.2@2437,1914 v1(2438.08,1915.08) ; X4.4@2473,1997 v1(2473.52,1997.52) ; U11.0@2511.74,-152 2511.74,-226.74 v1@2513,-228
  Layer 3 w12: v1(-622.44,761.39) v1@-622,761.82
  Bottom Layer w12: H1.A31@-733,344.17 -664.1,344.17 -648.51,328.58 -646.18,328.58 -640.32,322.72 -640.32,318.87 -629,307.54 v1(-629,306) ; H1.A28@-733,462.28 -725.22,454.5 -640.05,454.5 -629.54,444 v1(-628,444) ; H1.A27@-733,501.65 -725.22,493.87 -635.87,493.87 -628,486 -628,446.63 -626.37,445 v1@-626,445 ; H1.A24@-733,619.76 -725.22,611.98 -649.99,611.98 v1(-631,593) ; H1.A23@-733,659.13 -638.87,659.13 v1(-626,672) ; H1.A20@-733,777.24 -638.29,777.24 v1(-622.44,761.39) ; H1.A18@-733,855.98 v1(-655.98,855.98) ; H1.A15@-733,974.09 -635.09,974.09 v1(-623,962) ; H1.A12@-733,1092.2 -630.75,1092.2 -624.54,1086 v1(-623,1086) ; H1.A4@-733,1485.91 -624.91,1485.91 v1@-624,1485 ; FPC1.3@101,1123.44 v1(133.56,1123.44) ; v1(427,362) 428.09,363.09 436.58,363.09 455.03,381.54 C23.1@457,381.54 ; v1(442.69,-601.61) 443.78,-600.52 443.78,-586.93 461,-569.72 C66.2@461,-566 ; C23.1@457,379.54 495.53,379.54 C24.1@496.53,380.54 ; v1(480.53,722.46) 652.53,722.46 C36.1@653.53,723.46 707.89,723.46 726.76,742.32 v1(727,742.32) ; C8.1@569.87,2524.54 571.57,2524.54 580.33,2533.31 C9.1@580.33,2586 580.33,2587.97 621.36,2629 U8.2@698.41,2629 v1(754.7,2629) 825.35,2629 843.04,2611.31 882.75,2611.31 888.61,2605.45 888.61,2576.44 902.99,2562.06 902.99,2552 ; C63.2@648,-435 653.91,-440.91 653.91,-465.91 v1(655,-467) ; C3.1@866.17,2525.17 C3.1@861.87,2529.46 863.84,2529.46 886.39,2552 902.99,2552 ; R74.1@874.27,2497 872.36,2495.09 872.36,2456.91 870.18,2454.72 838.58,2454.72 761,2377.14 761,2371 748,2358 748,2345.14 774.54,2318.59 R15.1@774.54,2259 820.94,2259 837.03,2242.91 C12.1@839,2242.91 839.77,2243.69 897.23,2243.69 C13.1@898,2244.46 901.54,2248 v1(1026,2248) ; U5.2@919.6,2552 902.99,2552 ; U6.3@1089.18,2378.6 1134.4,2378.6 v1(1138,2375) ; C1.2@1099.54,2534 1099.54,2532.03 1128,2503.57 v1(1128,2498) ; HDMI_A1.20@1760.06,2882.57 2023.61,2882.57 RJ1.13@2083.27,2822.91 RJ1.12@2405.32,2822.91 ; C14.2@1939,2408.72 1939.09,2408.8 1939.09,2509.83 RJ1.B02@1939.17,2509.92 ; C46.1@2008.46,2071 v1(2008.46,2104.46) ; C21.1@2037,-407.54 C22.1@2096,-407.54 2096,-472.7 v1(2169,-545.7) ; R107.2@2091.8,1751.97 2095.64,1748.13 2095.64,1743.94 2107.73,1731.85 v1(2107.73,1730.31) ; v1(2116,496) 2116,494.46 2118.36,492.09 X3.17@2118.36,424.61 ; v1(2119,1856.72) C34.1@2120,1856.72 R104.1@2154,1856.72 ; v1(2123.8,2060.87) 2124.3,2061.37 2160.3,2061.37 C47.1@2160.8,2061.87 ; R104.1@2156,1855.72 R102.1@2182.97,1855.72 ; v1(2184,1891) 2190,1885 R102.1@2190,1852.73 ; C30.1@2197.43,2010.46 v1(2197.43,2011.43) ; v1(2211,1973) C41.1@2211.72,1973 ; v1(2239.4,1731.07) 2239.4,1732.62 2251.96,1745.17 2251.96,1748.13 R108.2@2255.8,1751.97 ; v1(2276.17,2009.17) C29.1@2276.17,2010.46 ; v1(2301.36,1969.43) C28.1@2312.08,1969.43 ; v1(2303.07,1914.07) R97.2@2303.07,1914.43 ; C43.2@2304.8,1743.89 2306.77,1743.89 2328.44,1765.56 2328,1766 2328,1766.27 v1(2330.02,1768.3) ; 2337.23,1774.35 C44.2@2337.23,1846.43 ; R60.2@2395.53,2013.43 2399.37,2017.28 2423.1,2017.28 2424.1,2018.28 2464.72,2018.28 2469.67,2013.33 2469.67,2001.36 v1(2473.52,1997.52) C39.1@2473.52,1998.43 ; R99.2@2407.63,1903.6 2426.25,1903.6 C38.1@2438.08,1915.43 v1(2438.08,1915.08)
  other v1: 267,-660 290,-660 1232.56,-612.57 1778.56,-611.57 2544.23,-528.54 648,-516 621,-514 1788.56,-378.57 1041,-362 1040,-323 1640.56,-318.57 1042,-252 837,-230 2511.74,-229 813,-223 1042,-222 780,-219 1041,-191 216,-171 1041,-161 0,327.95 0,1072.05 1758,1080 0,1285.95 1760,1285.95 2362.6,1755.87 2399.6,1755.87 2265.6,1880.87 2236,1887 2180.28,1944 2210.28,1944 2237.65,1968.81 1760,2030.05 8,2601 -242,2602 -106,2602 1612,2693 1495,2694 1435,2695 1377,2697 -118.74,2845.25 5.43,2845.25 -242.91,2849.25
HDMI_SCL_LS: HDMI_A1.15 Q1.3 R20.2 | length 510.4
  Top Layer w6.16: v1(1504.99,2991.01) 1573.06,2922.94 HDMI_A1.15@1573.06,2618
  Bottom Layer w6.16: R20.2@1402,2976.09 1480.08,2976.09 1495,2991.01 v1(1504.99,2991.01)
HDMI_SDA_LS: HDMI_A1.16 Q3.3 R29.2 | length 401.4
  Top Layer w6.16: HDMI_A1.16@1592.74,2618 1592.74,2757.97 v1(1635,2800.23)
  Bottom Layer w6.16: Q3.3@1637.79,2803.02 1637.79,2810.02 1652.71,2824.94 1662.73,2824.94 1716.35,2878.56 1716.35,2947.77 1728.03,2959.46 R29.2@1730,2959.46
JTAG_DM: R71.2 U10.6 | length 392.8
  Top Layer w6.16: R71.2@664,588.73 v1(664,609) ; v1(901.86,677.67) 904.98,677.67 908.76,673.89 949.5,673.89 U10.6@950.43,672.96
  Bottom Layer w6.16: v1(664,609) 647.9,592.9 647.9,587.8 651.51,584.19 778.82,584.19 865.63,671 892.48,671 899.15,677.67 v1(901.86,677.67)
JTAG_DM_R: R71.1 U13.1 | length 119
  Top Layer w5.1: U13.1@633.53,455.05 633.53,483.77 626.08,491.22 626.08,501.27 646.39,521.58 646.39,537.66 R71.1@664,555.27
JTAG_DP: R69.2 U10.7 | length 409.1
  Top Layer w6.16: R69.2@629,588.73 v1(629,609) ; v1(902,655) 903.72,653.28 U10.7@950.43,653.28
  Bottom Layer w6.16: v1(629,609) 629,607.46 636.84,599.62 636.84,577.64 640.45,574.03 783.03,574.03 869.84,660.84 893.04,660.84 898.88,655 v1(902,655)
JTAG_DP_R: R69.1 U13.2 | length 114.7
  Top Layer w5.1: U13.2@608.53,455.05 608.53,483.76 615.98,491.21 615.98,505.45 636.29,525.76 636.29,547.98 R69.1@629,555.27
JTAG_ROM_CLK: R22.2 U9.4 U10.44 | length 303.9
  Top Layer w6.16: R22.2@1043,1018 1070.56,1018 1100.16,988.4 U9.4@1110,988.4 1119.84,988.4 1138.73,969.51 1138.73,898.86 1124.88,885 1096,885 1080.35,869.35 U10.44@1080.35,822.57
JTAG_ROM_CS: R24.2 U9.5 U10.45 | length 210.5
  Top Layer w6.16: U10.45@1060.67,822.57 1060.67,912.33 1041.54,931.46 R24.2@1041.54,955 1106,955 U9.5@1110,951
JTAG_ROM_DATA: R19.1 U9.3 U10.43 | length 299.6
  Top Layer w6.16: U10.43@1100.04,822.57 1100.04,869.04 1105.84,874.84 1129.08,874.84 1166,911.76 1166,947.93 1206.47,988.4 U9.3@1216.31,988.4 1226.15,988.4 1237.01,977.54 R19.1@1278,977.54
LED_10_100: R96.1 U12.32 | length 52.2
  Top Layer w6.16: U12.32@2333.26,1894.31 2333.37,1894.2 2357.03,1894.2 v1(2357.14,1894.09)
  Bottom Layer w6.16: R96.1@2335.8,1877.43 2350.25,1891.88 2354.93,1891.88 v1(2357.14,1894.09)
LED_1000: R25.1 R99.1 U12.34 | length 1203.7
  Top Layer w6.16: U12.34@2333.26,1925.81 2333.62,1925.45 2373.81,1925.45 v1(2374.8,1926.43) ; v1(2382,2495) 2381,2496 2382,2497 2382,2682 2418.27,2718.27 v1(2449.97,2718.27)
  Bottom Layer w6.16: v1(2382,2495) 2525,2352 2525,1927 2472,1874 2413.3,1874 2383.97,1903.33 2383.97,1926.97 2384.26,1927.26 R99.1@2383.97,1927.26 ; v1(2449.97,2718.27) R25.1@2514,2718.27
LED_ACT: R26.1 R97.1 U12.33 | length 1553.1
  Top Layer w6.16: U12.33@2333.26,1910.06 2364.72,1910.06 2375.86,1898.93 2375.86,1888.91 v1(2378.07,1886.7)
  Bottom Layer w6.16: R26.1@1980,2731.27 2071.73,2731.27 2117.42,2685.58 2117.42,2540.58 2141.84,2516.16 2383.37,2516.16 2537.16,2362.37 2537.16,1924.79 2472.37,1860 2414.23,1860 2410.39,1863.84 2409.09,1863.84 2402.54,1870.4 2396.24,1870.4 2385.84,1880.79 2385.84,1887.09 v1@2382.15,1890.78 ; R97.1@2336.53,1914.43 2359.92,1914.43 2373.07,1901.28 2373.07,1899.86 v1@2382.15,1890.78 ; v1(2378.07,1886.7) v1@2382.15,1890.78
MGT_CLK0_N: C51.1 U4.11 | length 763.6
  Top Layer w5.88: v1(-315.56,814.44) -315.56,812.36 -309.97,806.78 -309.97,669.59 -211.19,570.81 -209.11,568.73 -201.82,561.44 -201.82,556.56 -202.53,555.86 -202.53,552.63 -189.58,539.68 -186.35,539.68 -185.64,540.39 -180.77,540.39 -178.69,538.31 -160.33,519.95 -118.61,519.95 -115.17,516.5 -115.17,514.96 -113.18,512.98 U4.11@-95.47,512.98
  Bottom Layer w5.88: C51.1@-500.57,1015 -487.57,1028 -444.39,1028 -314.48,898.1 -314.48,815.52 v1(-315.56,814.44)
MGT_CLK0_N_R: C51.2 H1.A14 R85.1 | length 211.2
  Bottom Layer w4.29: H1.A14@-733,1013.46 -721.37,1025.1 -651.63,1025.1 -647.88,1028.85 -546.21,1028.85 -543.7,1026.34 -543.7,1022.7 C51.2@-536,1015
  other v1: -536,1016.27
MGT_CLK0_P: C50.1 U4.13 | length 758.5
  Top Layer w5.88: v1(-292.95,814.16) -292.95,810.96 -299.09,804.81 -299.09,674.09 -155.83,530.83 -97.31,530.83 U4.13@-95.47,532.67
  Bottom Layer w5.88: C50.1@-500.57,1053 -486.45,1038.88 -439.88,1038.88 -303.6,902.6 -303.6,827.08 -292.95,816.43 v1(-292.95,814.16)
MGT_CLK0_P_R: C50.2 H1.A13 R85.2 | length 202.9
  Bottom Layer w4.29: H1.A13@-733,1052.83 -664.1,1052.83 -650.41,1039.14 -546.21,1039.14 -543.7,1041.66 C50.2@-543.7,1045.3 ; v1(-536,1049.73) C50.2@-536,1053
MGT_CLK1_N: U4.23
MGT_CLK1_P: U4.25
MGT_RX_N_0: R111.1 U4.41 | length 1053.8
  Top Layer w5.88: R111.1@-465.91,451 -454.79,462.12 -259.51,462.12 -161.51,364.12 -67.49,364.12 37.88,469.49 37.88,789.51 19.13,808.26 U4.41@-95.46,808.26